# Altium PCB LKS_Motor_0331.PcbDoc (part 3 of 3)
Units mm, origin at the board's own origin, x right, y up, seen from the top; angles counter-clockwise.
Board outline 117 x 10 mm, 2 copper layers (Top Layer, Bottom Layer); 110 components, 71 nets, 323 pads, 187 vias.
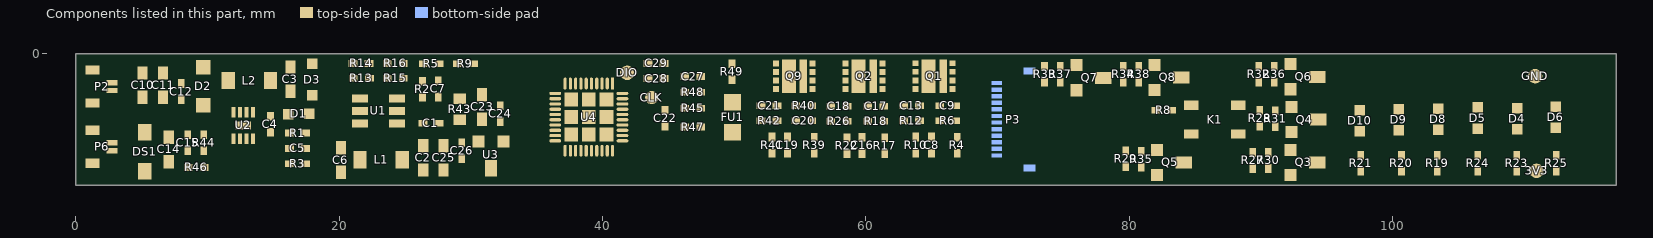
[diagram p3: the components of this part, seen from the top]

## Polygon pours and split planes (outlines as drawn) (continued)
VBAT_8V4 on Bottom Layer "Top Layer-No Net" (solid, remove dead copper): 19.413,-2.38 20.278,-2.38 21.98,-0.815 22.361,-0.815 67.394,-0.815 67.572,-0.652 67.572,-0.325 67.572,-0.138 67.496,-0.068 52.68,-0.068 21.37,-0.068 20.049,-1.282
PGND on Bottom Layer "Top Layer-No Net" (solid, remove dead copper): 50.851,-1.092 50.851,-3.962 50.952,-4.064 51.41,-4.064 63.195,-4.064 63.525,-3.734 63.576,-3.683 63.576,-2.845 63.576,-2.667 63.271,-2.362 62.205,-2.362 61.9,-2.362 61.671,-2.591 61.062,-3.2 59.715,-3.2 58.268,-3.2 58.064,-2.997 58.014,-2.946 58.014,-2.438 58.014,-1.93 57.836,-1.753 57.328,-1.753 56.388,-1.753 56.134,-2.007 54.966,-3.175 54.559,-3.175 52.73,-3.175 52.68,-3.124 52.527,-2.972 52.527,-2.819 52.527,-1.092

## Keep-outs
Keep-Out Layer:
  circle w0.1: c96,-7.25 r0.5
  circle w0.1: c96,-2.25 r0.5
  circle w0.1: c114,-7.25 r0.5
  circle w0.1: c114,-2.25 r0.5
  lines w0.1: 0,-10 117,-10 117,0 0,0 0,-10

## Silkscreen, mask and mechanical layers (free items; w line width, h text height)
Top Overlay:
  circle w0.1: c2.134,-7.01 r0.564
  circle w0.1: c2.007,-2.438 r0.432
  lines w0.1: 4.877,-1.956 4.877,-2.946 5.613,-2.946
Bottom Overlay:
  drawing of 23 lines, arcs and shapes, not listed
  text "20240331" at 115.875,-1.6 h1 r90
  text "LKS_074DO_V2.0" at 109.068,-2.073 h1